# EAGLE board CFO rev 1.4_dviid_jsr (EAGLE 5.07)
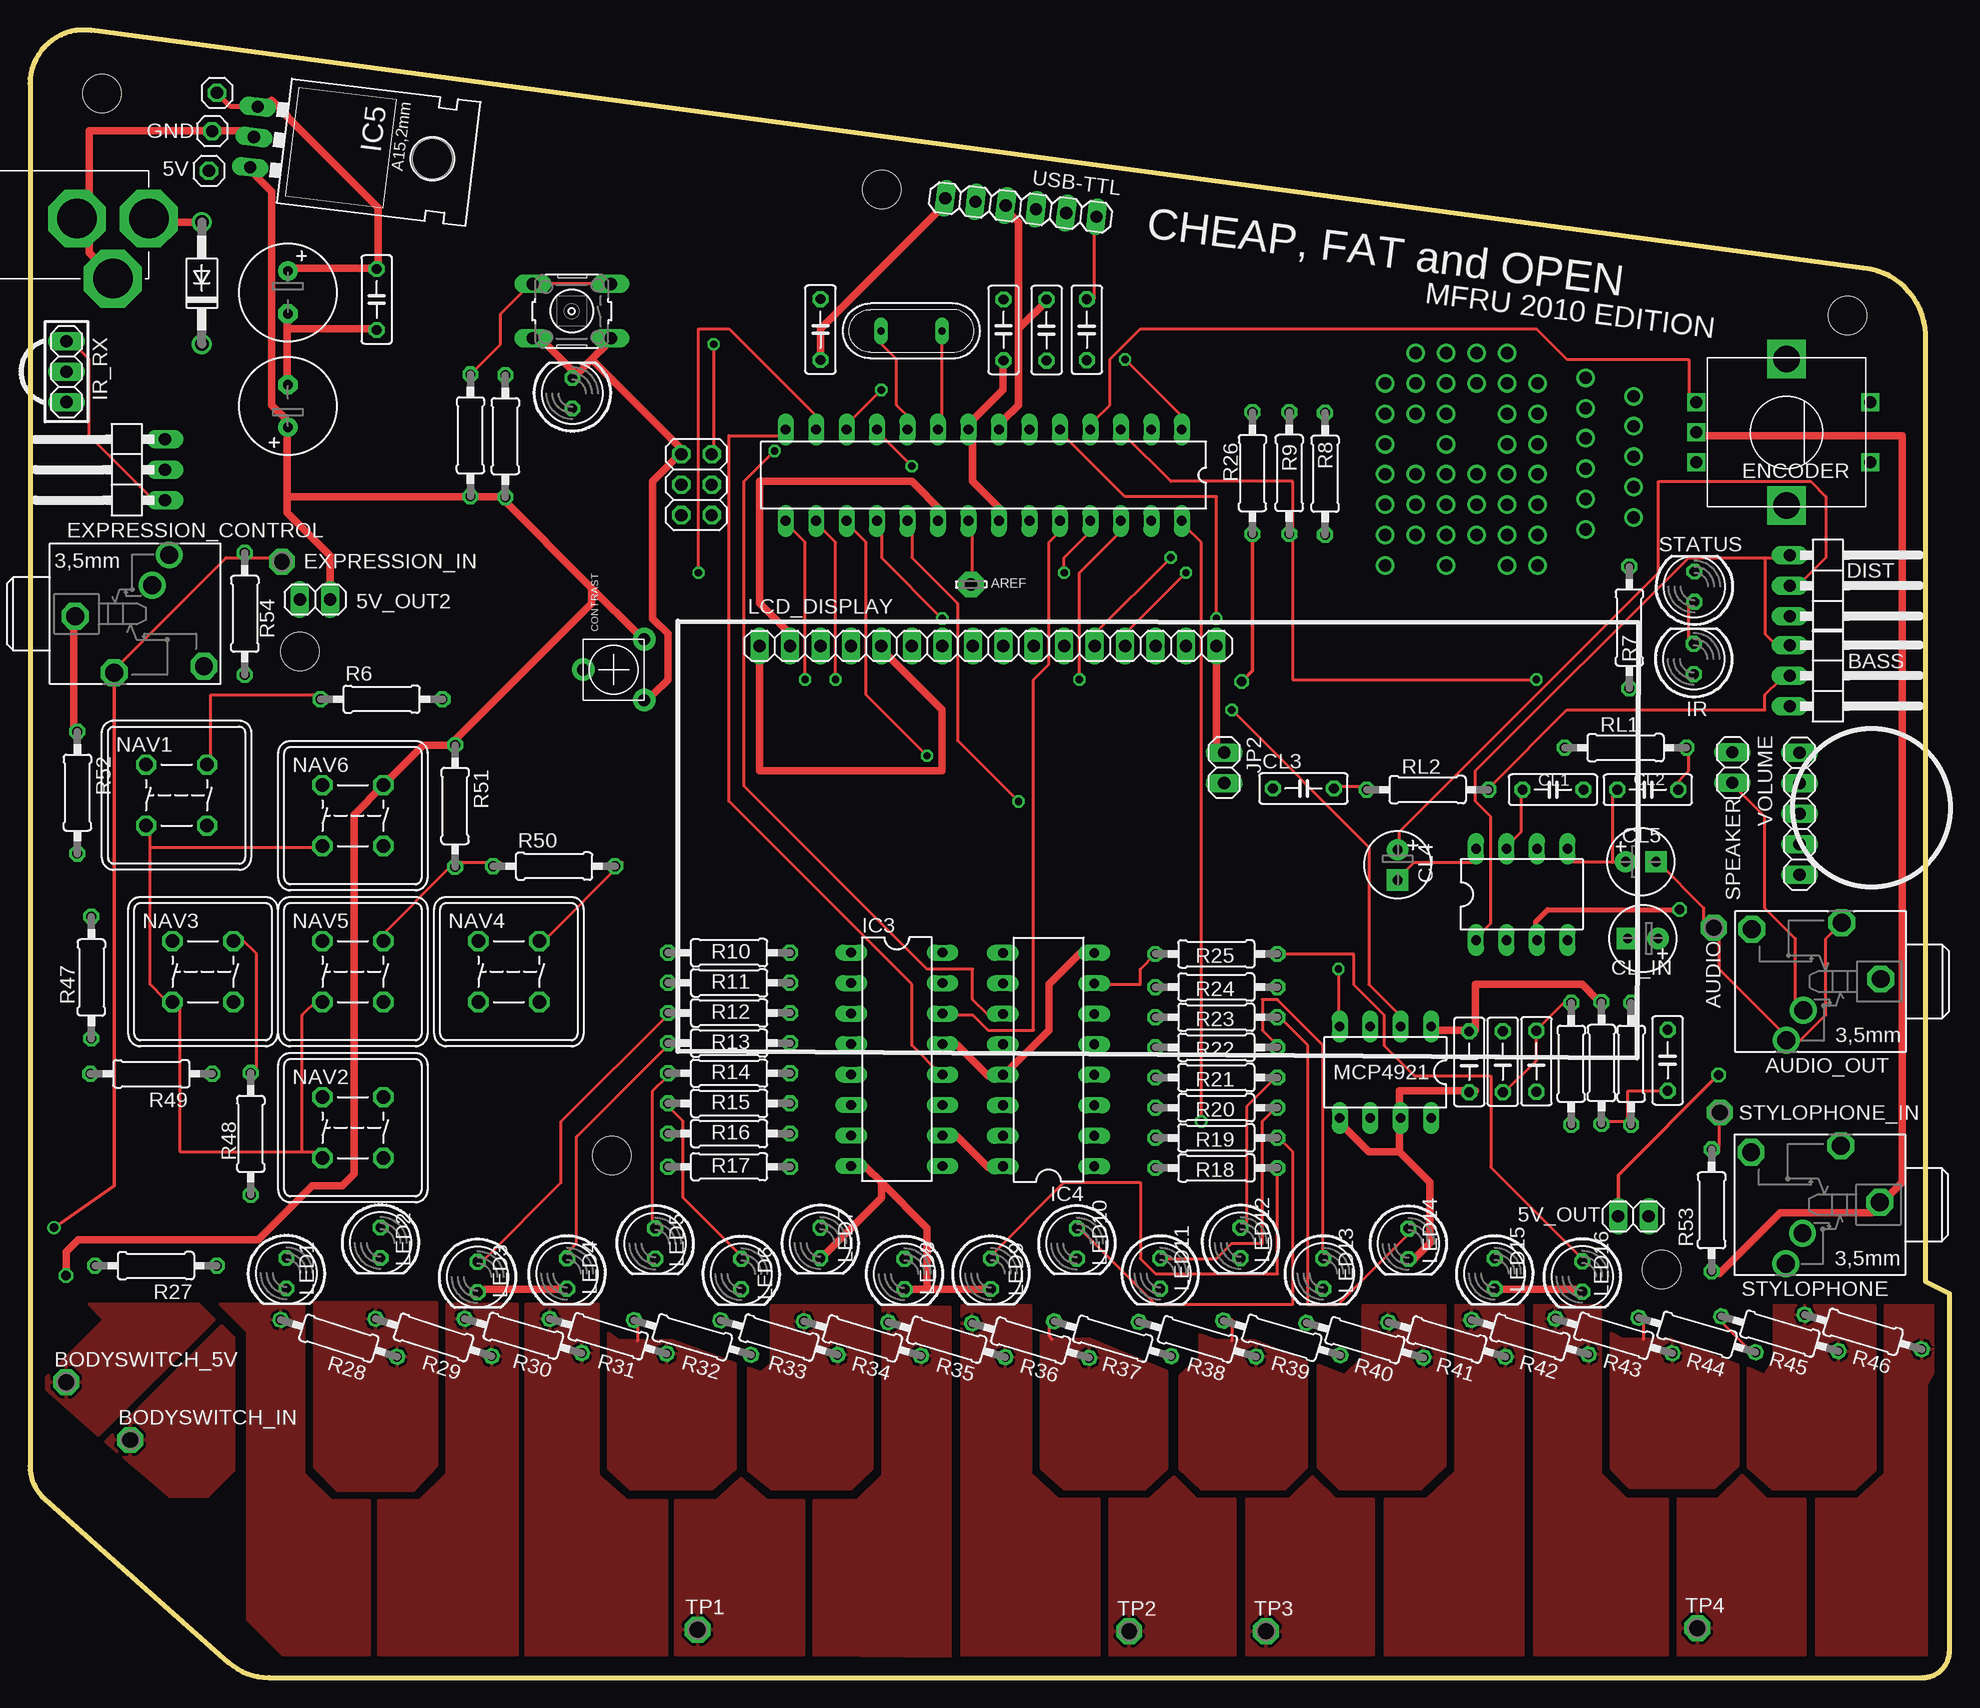
[diagram p0: board, top side]
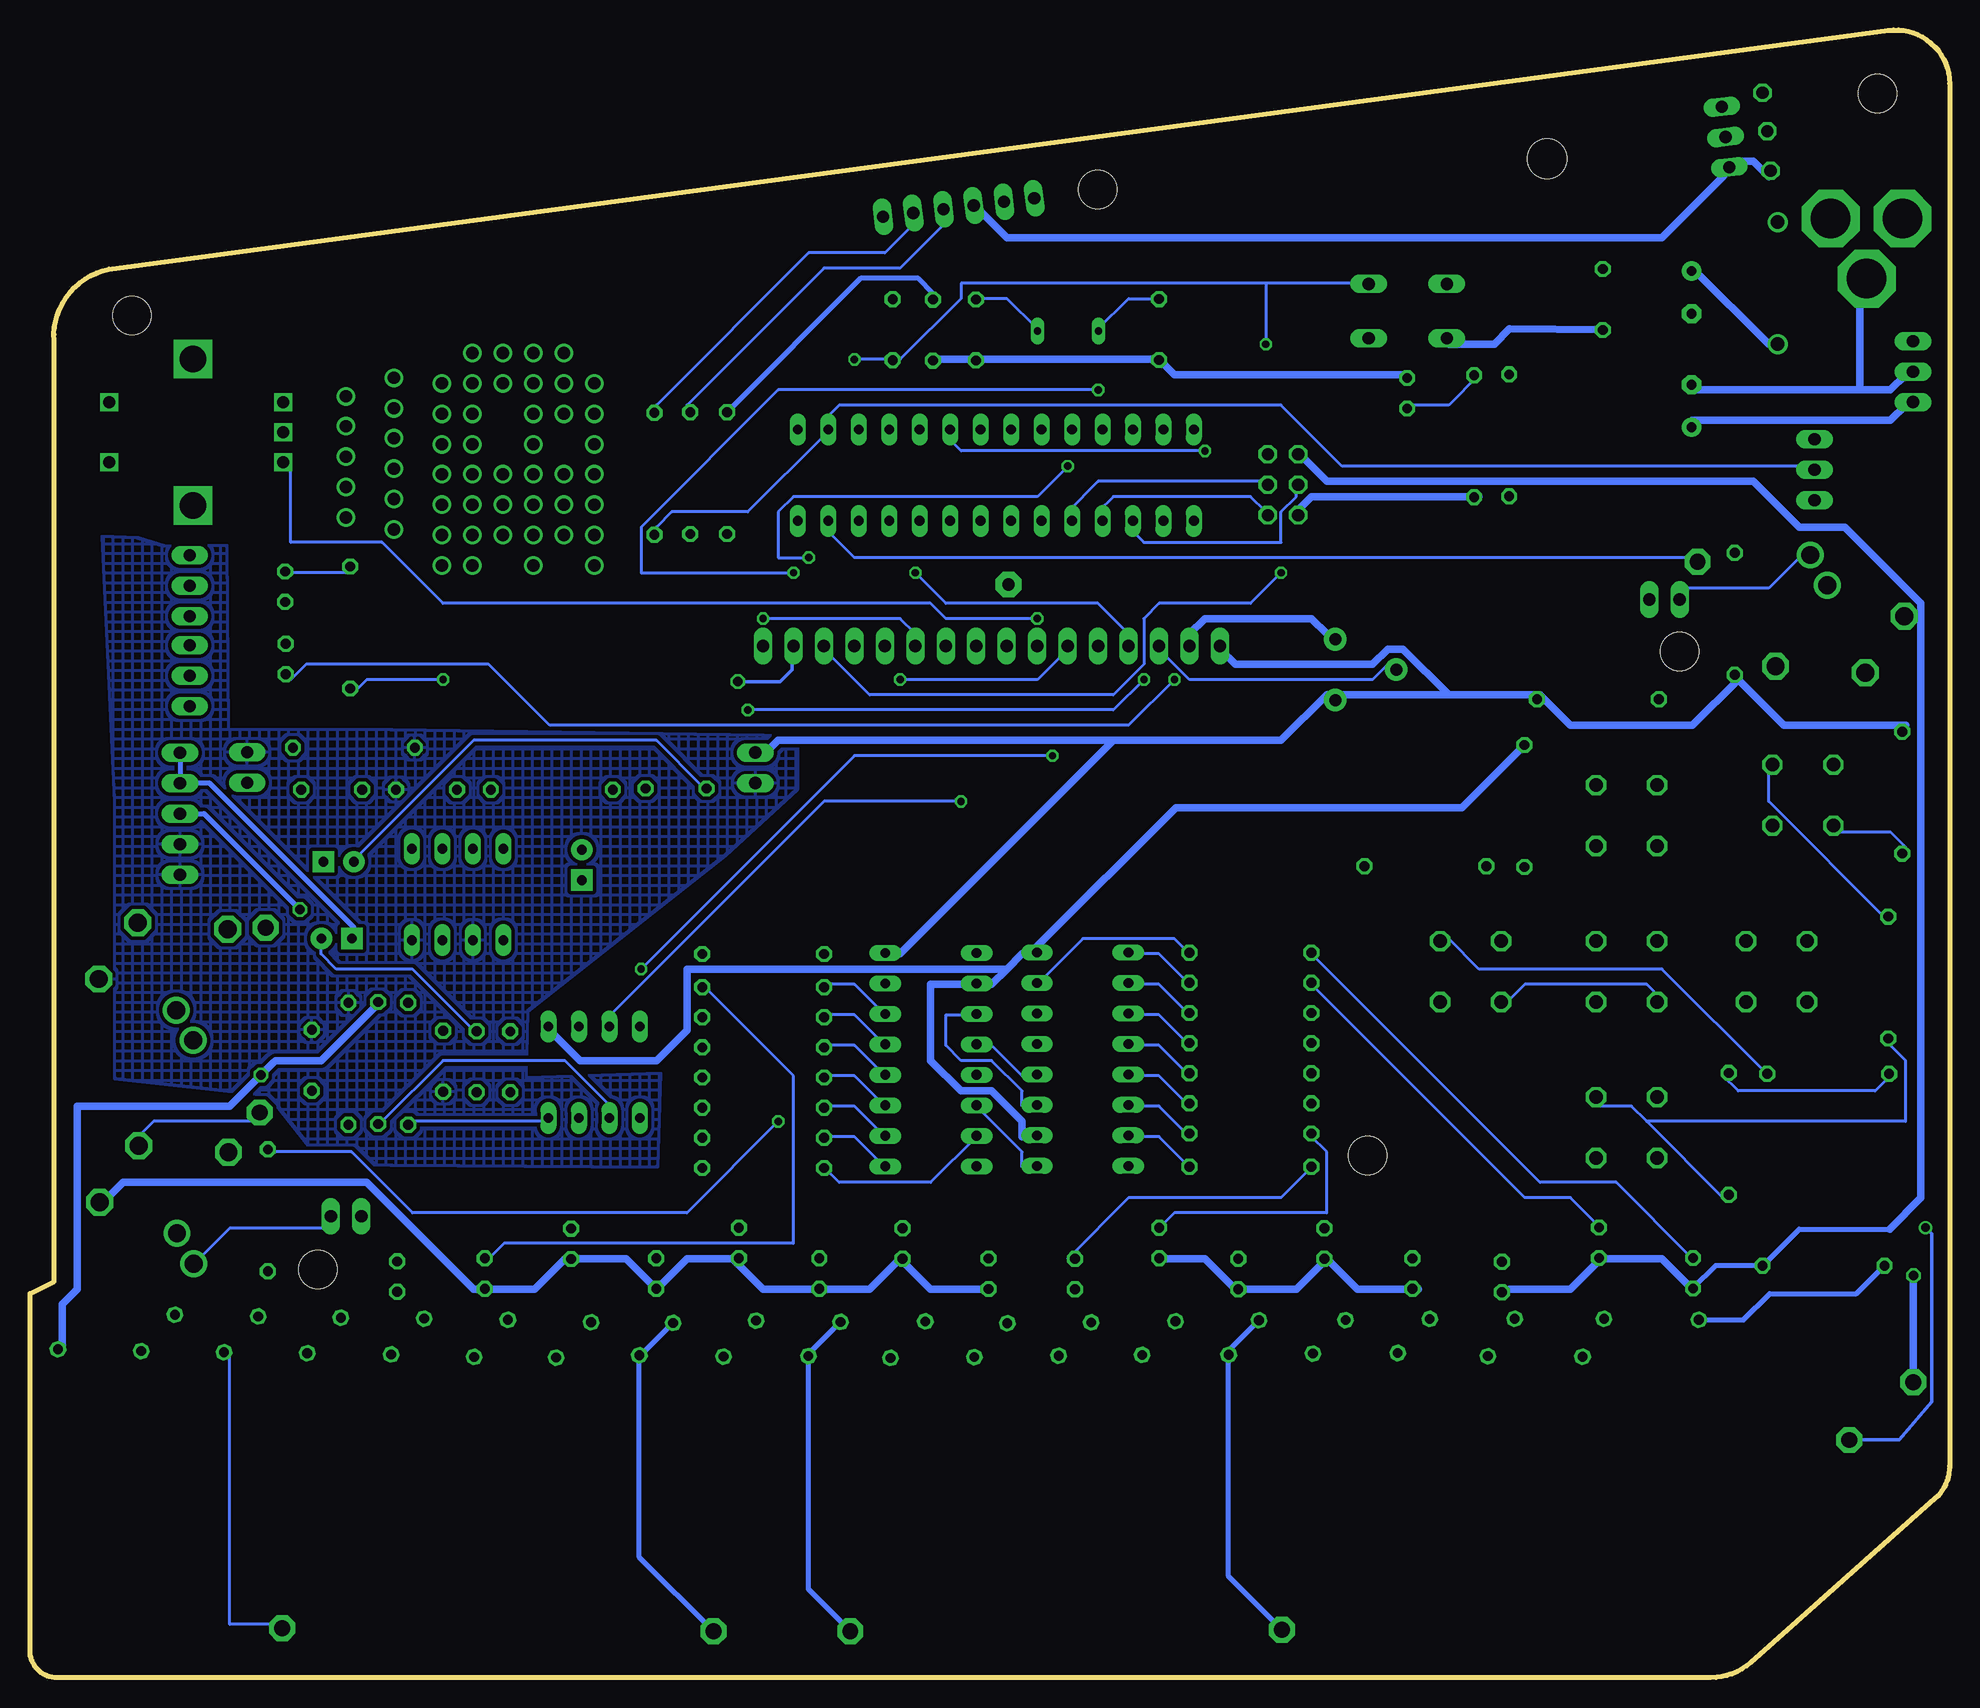
[diagram p1: board, bottom side, seen from below]

Size 160 x 137.31 mm. Coordinates in mm from the lower left corner, seen from the top.
Outline: 158,111.4 arc82 153.43,117.37 5.11,137.27 arc98 0,132.84 0,17.62 arc48 1.21,14.92 16.58,1.26 arc42 19.9,0 157.76,0 arc90 160,2.24 160,32 158,33 158,111.4
Copper layers (1*16): Top 0.035mm / dielectric 1.5mm / Bottom 0.035mm
Design rules "default": minimum track width 10mil, minimum drill 24mil, track to track 8mil, track to pad 8mil, pad to pad 8mil, via to via 8mil, smd to smd 8mil, copper to edge 40mil, drill to drill 8mil, minimum pad ring 10mil, minimum via ring 8mil, stop-mask expansion 4mil, vias tented up to drill 0mil, thermal gap 10mil
Net classes: 1 power: width 0.61 mm
Holes 3.2 mm at 48.5,43.5 136,34 151.5,113.5 71,124 6,132 22.5,85.5

## Footprints (pad centres in the part's own frame; a part is rotated, then mirrored left to right if it is on the bottom)
1X01 = drill 1.016 octagon: 1 0,0
1X02 = drill 1.016 long: 1 -1.27,0; 2 1.27,0
LSP10 = drill 1.016 pad 2.159 octagon: MP 0,0
P1-13 = drill 1.321 pad 2.159 octagon: 1 0,0
PG203J = drill 1.499 octagon: 1 -5.004,-0.203; 4 5.74,-4.369; 5 -1.753,-4.902 | drill 1.499 round: 2 2.845,4.902; 3 1.448,2.388
1X03/90 = drill 1.016 long: 1 -2.54,-3.81; 2 0,-3.81; 3 2.54,-3.81
C050-025X075 = drill 0.813 octagon: 1 -2.54,0; 2 2.54,0
E3,5-8 = drill 0.813 pad 1.6 round: + -1.778,0 | drill 0.813 pad 1.6 octagon: - 1.778,0
E2,5-6 = drill 0.813 pad 1.778 round: + 0,0 | drill 0.813 pad 1.778 square: - 2.54,0
TRIM_POT_PTH = drill 1 pad 1.88 round: 1 -2.54,-2.54; 2 0,2.54; 3 2.54,-2.54
DO41-10 = drill 1.118 round: A 5.08,0; C -5.08,0
DC-21MM = drill 3.302 pad 4.826 octagon: 1 -5.08,-3.353; 2 -0.076,-6.35; 3 -0.076,-0.356
ALPS_EC12E_SW = drill 1 square: A -2.5,-7.5; B 2.5,-7.5; C 0,-7.5; D -2.5,7; E 2.5,7 | drill 2.2 square: GND1 -6.1,0; GND2 6.1,0
DIL28-3 = drill 0.813 long: 1 -16.51,-3.81; 2 -13.97,-3.81; 3 -11.43,-3.81; 4 -8.89,-3.81; 5 -6.35,-3.81; 6 -3.81,-3.81; 7 -1.27,-3.81; 8 1.27,-3.81; 9 3.81,-3.81; 10 6.35,-3.81; 11 8.89,-3.81; 12 11.43,-3.81; 13 13.97,-3.81; 14 16.51,-3.81; 15 16.51,3.81; 16 13.97,3.81; 17 11.43,3.81; 18 8.89,3.81; 19 6.35,3.81; 20 3.81,3.81; 21 1.27,3.81; 22 -1.27,3.81; 23 -3.81,3.81; 24 -6.35,3.81; 25 -8.89,3.81; 26 -11.43,3.81; 27 -13.97,3.81; 28 -16.51,3.81
DIL16 = drill 0.813 long: 1 -8.89,-3.81; 2 -6.35,-3.81; 3 -3.81,-3.81; 4 -1.27,-3.81; 5 1.27,-3.81; 6 3.81,-3.81; 7 6.35,-3.81; 8 8.89,-3.81; 9 8.89,3.81; 10 6.35,3.81; 11 3.81,3.81; 12 1.27,3.81; 13 -1.27,3.81; 14 -3.81,3.81; 15 -6.35,3.81; 16 -8.89,3.81
78XXL = drill 1.016 long: GND 0,-3.81; IN -2.54,-3.81; OUT 2.54,-3.81 | hole 3.302: 0,11.176
2X03 = drill 1.016 octagon: 1 -2.54,-1.27; 2 -2.54,1.27; 3 0,-1.27; 4 0,1.27; 5 2.54,-1.27; 6 2.54,1.27
LED5MM = drill 0.813 octagon: A -1.27,0; K 1.27,0
1X03 = drill 1.016 long: 1 -2.54,0; 2 0,0; 3 2.54,0
1X16 = drill 1.016 long: 1 -19.05,0; 2 -16.51,0; 3 -13.97,0; 4 -11.43,0; 5 -8.89,0; 6 -6.35,0; 7 -3.81,0; 8 -1.27,0; 9 1.27,0; 10 3.81,0; 11 6.35,0; 12 8.89,0; 13 11.43,0; 14 13.97,0; 15 16.51,0; 16 19.05,0
DIL08 = drill 0.813 long: 1 -3.81,-3.81; 2 -1.27,-3.81; 3 1.27,-3.81; 4 3.81,-3.81; 5 3.81,3.81; 6 1.27,3.81; 7 -1.27,3.81; 8 -3.81,3.81
DTE6K = drill 1.118 octagon: 1 -2.54,2.54; 2 2.54,2.54; 3 2.54,-2.54; 4 -2.54,-2.54
0207/10 = drill 0.813 octagon: 1 -5.08,0; 2 5.08,0
B3F-10XX = drill 1.016 long: 1 -3.251,2.261; 2 3.251,2.261; 3 -3.251,-2.261; 4 3.251,-2.261
LM386 = drill 0.813 long: 1 2.54,-2.54; 2 5.08,-2.54; 3 7.62,-2.54; 4 10.16,-2.54; 5 10.16,5.08; 6 7.62,5.08; 7 5.08,5.08; 8 2.54,5.08
1X06 = drill 1.016 long: 1 -6.35,0; 2 -3.81,0; 3 -1.27,0; 4 1.27,0; 5 3.81,0; 6 6.35,0
1X05 = drill 1.016 long: 1 -5.08,0; 2 -2.54,0; 3 0,0; 4 2.54,0; 5 5.08,0
QS = drill 0.61 long: 1 -2.54,0; 2 2.54,0

## Placement (x,y rotation side)
5V  [1X01]  14.91,125.57 0 top
5V_OUT  [1X02]  133.65,38.45 180 top
5V_OUT2  [1X02]  23.76,89.84 0 top
AREF  LSP10  [LSP10]  78.44,91.1 0 top
AUDIO  TPPAD1-13  [P1-13]  140.35,62.5 0 top
AUDIO_OUT  PG203J  [PG203J]  149.25,58.02 180 top
BASS  switch  [1X03/90]  150.5,83.5 270 top
BODYSWITCH_5V  TPPAD1-13  [P1-13]  3.01,24.63 0 top
BODYSWITCH_IN  TPPAD1-13  [P1-13]  8.35,19.81 0 top
C1  100n  [C050-025X075]  84.74,112.3 270 top
C2  22p  [C050-025X075]  81.15,112.31 90 top
C3  22p  [C050-025X075]  65.89,112.34 90 top
C4  100n  [C050-025X075]  88.09,112.33 270 top
C5  100n  [C050-025X075]  28.9,114.85 90 top
C6  100u  [E3,5-8]  21.49,115.44 270 top
C7  100u  [E3,5-8]  21.5,105.97 90 top
C8  100nF  [C050-025X075]  119.97,51.32 270 top
C9  100nF  [C050-025X075]  136.51,51.44 90 top
C10  10nF  [C050-025X075]  125.56,51.37 270 top
C11  10nF  [C050-025X075]  122.76,51.33 90 top
CL1  100n  [C050-025X075]  126.95,74 0 top
CL2  47n  [C050-025X075]  134.85,74 0 top
CL3  33n  [C050-025X075]  106.15,74.1 0 top
CL4  10u  [E2,5-6]  114,69 270 top
CL5  330u  [E2,5-6]  133,68 0 top
CL_IN  2u2  [E2,5-6]  135.7,61.6 180 top
CONTRAST  4.7k  [TRIM_POT_PTH]  48.65,84 90 top
D1  1N4004  [DO41-10]  14.32,116.21 90 top
DC1  DC21MMX  [DC-21MM]  3.56,121.67 90 top
DIST  switch  [1X03/90]  150.5,91 270 top
ENCODER  EC12E_SW  [ALPS_EC12E_SW]  146.41,103.78 270 top
EXPRESSION_CONTROL  PG203J  [PG203J]  8.76,88.65 0 top
EXPRESSION_IN  TPPAD1-13  [P1-13]  21,93 0 top
GND  [1X01]  15.19,128.87 0 top
IC1  ATMEGA  [DIL28-3]  79.49,100.21 180 top
IC3  74HC595N  [DIL16]  72.25,51.53 270 top
IC4  74HC595N  [DIL16]  84.9,51.5 90 top
IC5  [78XXL]  22.45,127.93 263 top
ICSP  ICSP  [2X03]  55.55,99.42 90 top
IR  [LED5MM]  138.68,84.89 90 top
IR_RX  [1X03]  3.05,108.84 90 top
JP2  [1X02]  99.54,75.83 270 top
LCD_DISPLAY  [1X16]  79.86,85.98 0 top
LED1  [LED5MM]  21.38,33.71 270 top
LED2  [LED5MM]  29.22,36.24 270 top
LED3  [LED5MM]  37.3,33.39 270 top
LED4  [LED5MM]  44.76,33.67 270 top
LED5  [LED5MM]  52.11,36.18 270 top
LED6  [LED5MM]  59.28,33.63 270 top
LED7  [LED5MM]  65.88,36.23 270 top
LED8  [LED5MM]  72.89,33.63 270 top
LED9  [LED5MM]  80.1,33.66 270 top
LED10  [LED5MM]  87.26,36.18 270 top
LED11  [LED5MM]  94.21,33.67 270 top
LED12  [LED5MM]  100.91,36.23 270 top
LED13  [LED5MM]  107.8,33.67 270 top
LED14  [LED5MM]  114.9,36.15 270 top
LED15  [LED5MM]  122.09,33.67 270 top
LED16  [LED5MM]  129.39,33.42 270 top
MCP4921  [DIL08]  112.98,50.45 180 top
NAV1  DTE6K  [DTE6K]  12.22,73.54 0 top
NAV2  DTE6K  [DTE6K]  26.92,45.84 0 top
NAV3  DTE6K  [DTE6K]  14.42,58.84 0 top
NAV4  DTE6K  [DTE6K]  39.92,58.84 0 top
NAV5  DTE6K  [DTE6K]  26.92,58.84 0 top
NAV6  DTE6K  [DTE6K]  26.92,71.84 0 top
PWR_LED  [LED5MM]  45.21,107.03 90 top
R1  10k  [0207/10]  130.99,51.22 90 top
R2  1K  [0207/10]  39.62,103.45 270 top
R3  10k  [0207/10]  133.46,51.15 270 top
R4  4.7k  [0207/10]  128.47,51.16 270 top
R5  10k  [0207/10]  36.71,103.53 270 top
R6  220  [0207/10]  29.3,81.54 0 top
R7  47  [0207/10]  133.31,87.52 270 top
R8  1k  [0207/10]  107.95,100.32 90 top
R9  1k  [0207/10]  104.97,100.38 90 top
R10  220  [0207/10]  58.27,60.42 0 top
R11  220  [0207/10]  58.27,57.9 0 top
R12  220  [0207/10]  58.27,55.39 0 top
R13  220  [0207/10]  58.27,52.88 0 top
R14  220  [0207/10]  58.27,50.37 0 top
R15  220  [0207/10]  58.27,47.86 0 top
R16  220  [0207/10]  58.27,45.34 0 top
R17  220  [0207/10]  58.27,42.58 0 top
R18  220  [0207/10]  98.89,42.47 180 top
R19  220  [0207/10]  98.89,44.99 180 top
R20  220  [0207/10]  98.89,47.5 180 top
R21  220  [0207/10]  98.89,50.01 180 top
R22  220  [0207/10]  98.89,52.52 180 top
R23  220  [0207/10]  98.89,55.03 180 top
R24  220  [0207/10]  98.89,57.55 180 top
R25  220  [0207/10]  98.89,60.31 180 top
R26  4.7  [0207/10]  101.9,100.38 270 top
R27  330  [0207/10]  10.5,34.33 180 top
R28  330  [0207/10]  25.74,28.28 162.4 top
R29  330  [0207/10]  33.64,28.35 162.2 top
R30  330  [0207/10]  41.12,28.48 163.7 top
R31  330  [0207/10]  48.2,28.45 163.5 top
R32  330  [0207/10]  55.21,28.36 163.5 top
R33  330  [0207/10]  62.43,28.34 163.5 top
R34  330  [0207/10]  69.39,28.27 163.5 top
R35  330  [0207/10]  76.42,28.16 163.5 top
R36  330  [0207/10]  83.41,28.09 163.5 top
R37  330  [0207/10]  90.25,28.24 163.5 top
R38  330  [0207/10]  97.32,28.2 163.5 top
R39  330  [0207/10]  104.34,28.31 163.5 top
R40  330  [0207/10]  111.27,28.12 163.5 top
R41  330  [0207/10]  118.1,28.17 163.5 top
R42  330  [0207/10]  125.03,28.38 163.5 top
R43  330  [0207/10]  132.02,28.48 163.5 top
R44  330  [0207/10]  138.96,28.56 163.5 top
R45  330  [0207/10]  145.86,28.66 163.5 top
R46  330  [0207/10]  152.8,28.81 163.5 top
R47  220  [0207/10]  5.11,58.34 90 top
R48  220  [0207/10]  18.4,45.32 270 top
R49  220  [0207/10]  10.11,50.32 180 top
R50  220  [0207/10]  43.69,67.62 0 top
R51  220  [0207/10]  35.43,72.64 270 top
R52  10k  [0207/10]  3.95,73.75 270 top
R53  10k  [0207/10]  140.17,38.94 90 top
R54  10k  [0207/10]  17.9,88.65 90 top
RL1  10  [0207/10]  133,77.5 180 top
RL2  10k  [0207/10]  116.5,74 180 top
RX_ON/OFF  [1X03/90]  7.44,100.66 90 top
S1  [B3F-10XX]  45.16,113.88 180 top
SPEAKER  [1X02]  141.9,75.85 90 top
STATUS  [LED5MM]  138.74,90.92 90 top
STYLOPHONE  PG203J  [PG203J]  149.2,39.41 180 top
STYLOPHONE_IN  TPPAD1-13  [P1-13]  140.85,47.1 0 top
TP1  TPPAD1-13  [P1-13]  55.64,4 0 top
TP2  TPPAD1-13  [P1-13]  91.62,3.88 0 top
TP3  TPPAD1-13  [P1-13]  103.03,3.88 0 top
TP4  TPPAD1-13  [P1-13]  138.98,4.13 0 top
U$1  LM386  [LM386]  118,64 0 top
USB-TTL  [1X06]  82.59,122.52 173 top
VIN  VIN  [1X01]  15.59,132.07 0 top
VOLUME  [1X05]  147.5,72 90 top
XTAL  16mhz  [QS]  73.48,112.23 180 top

## Library data of the parts
5V 5V_OUT 5V_OUT2 BASS DIST GND ICSP IR_RX JP2 LCD_DISPLAY RX_ON/OFF SPEAKER USB-TTL VIN VOLUME = pinhead
AREF = solpad
AUDIO BODYSWITCH_5V BODYSWITCH_IN EXPRESSION_IN STYLOPHONE_IN TP1-TP4 = testpad
AUDIO_OUT EXPRESSION_CONTROL STYLOPHONE = con-hirschmann
C1-C11 CL1-CL3 R1-R54 RL1 RL2 = rcl
CL4 CL5 CL_IN U$1 = blushingboy_experimental
CONTRAST = SparkFun
D1 = diode
DC1 = powersupply
ENCODER = switch-alps
IC1 = atmel
IC3 IC4 = 74xx-eu
IC5 = v-reg
IR LED1-LED16 PWR_LED STATUS = led
MCP4921 = ic-package
NAV1-NAV6 = switch-misc
S1 = switch-omron
XTAL = special

## Nets
A0: IC1.23
A1: IC1.24 IC3.14
A2: IC1.25 LCD_DISPLAY.4
A3: IC1.26 LCD_DISPLAY.6
A4: BODYSWITCH_IN.1 EXPRESSION_CONTROL.5 EXPRESSION_IN.1 IC1.27 R54.2
A5: IC1.28 R53.2 STYLOPHONE.5 STYLOPHONE_IN.1
AGND: AUDIO_OUT.1 C9.2 C10.2 CL1.2 JP2.2 R3.1 RL1.2 SPEAKER.2 U$1.2 U$1.4 VOLUME.1 VOLUME.2
AREF: AREF.MP IC1.21
BROWN: USB-TTL.5
D2: ENCODER.A IC1.4
D3: IC1.5 LCD_DISPLAY.11
D4: IC1.6 IC3.11 IC4.11
D5: IC1.11 LCD_DISPLAY.12
D6: IC1.12 LCD_DISPLAY.13
D7: IC1.13 LCD_DISPLAY.14
D8: IC1.14 IC3.12 IC4.12
D9: IC1.15 IR.A
D10: IC1.16 MCP4921.2
D11: IC1.17 ICSP.4 MCP4921.4
D12: ENCODER.B IC1.18 ICSP.1
D13: IC1.19 ICSP.3 MCP4921.3
GND [power]: C1.2 C2.1 C3.1 C5.1 C6.- C7.- C8.2 CONTRAST.1 DC1.1 DC1.3 ENCODER.C EXPRESSION_CONTROL.1 GND.1 IC1.8 IC1.22 IC3.8 IC3.13 IC4.8 IC4.13 IC5.GND ICSP.6 IR_RX.2 JP2.1 LCD_DISPLAY.1 LCD_DISPLAY.5 LCD_DISPLAY.16 LED1.K LED2.K LED3.K LED4.K LED5.K LED6.K LED7.K LED8.K LED9.K LED10.K LED11.K LED12.K LED13.K LED14.K LED15.K LED16.K MCP4921.5 MCP4921.7 PWR_LED.K R6.2 R27.1 R52.1 R53.1 R54.1 S1.1 S1.2 STYLOPHONE.1 USB-TTL.6
GREEN: C4.1 USB-TTL.1
LEFT: CL_IN.- VOLUME.4 VOLUME.5
N$1: C10.1 C11.1 R4.1
N$2: C11.2 CL_IN.+
N$3: PWR_LED.A R2.1
N$4: R27.2 R28.2
N$5: 5V_OUT.1 STYLOPHONE.2
N$6: C2.2 IC1.9 XTAL.1
N$7: C3.2 IC1.10 XTAL.2
N$8 [power]: D1.A DC1.2
N$9: IR.K STATUS.A
N$10: CL4.- U$1.8
N$11: CL1.1 U$1.7
N$12: IC3.9 IC4.14
N$13: R7.1 STATUS.K
N$14: NAV1.2 R6.1 R47.2
N$15: NAV2.2 R47.1 R48.2
N$16: 5V_OUT2.1 EXPRESSION_CONTROL.2
N$17: LED1.A R10.1
N$18: LED2.A R11.1
N$19: NAV3.2 R48.1 R49.2
N$20: LED3.A R12.1
N$21: LED4.A R13.1
N$22: LED5.A R14.1
N$23: LED6.A R15.1
N$24: LED7.A R16.1
N$25: LED8.A R17.1
N$26: LED9.A R18.1
N$27: LED10.A R19.1
N$28: LED11.A R20.1
N$29: LED12.A R21.1
N$30: LED13.A R22.1
N$31: LED14.A R23.1
N$32: LED15.A R24.1
N$33: LED16.A R25.1
N$34: IC3.15 R10.2
N$35: IC3.1 R11.2
N$36: IC3.2 R12.2
N$37: IC3.3 R13.2
N$38: IC3.4 R14.2
N$39: IC3.5 R15.2
N$40: IC3.6 R16.2
N$41: IC3.7 R17.2
N$42: IC4.15 R18.2
N$43: IC4.1 R19.2
N$44: IC4.2 R20.2
N$45: IC4.3 R21.2
N$46: IC4.4 R22.2
N$47: IC4.5 R23.2
N$48: IC4.6 R24.2
N$49: IC4.7 R25.2
N$50: R28.1 R29.2
N$51: R29.1 R30.2
N$52: CONTRAST.2 LCD_DISPLAY.3
N$53: R30.1 R31.2
N$54: LCD_DISPLAY.15 R26.2
N$55: R31.1 R32.2
N$56: R32.1 R33.2 TP1.1
N$57: R33.1 R34.2
N$58: R34.1 R35.2
N$59: R35.1 R36.2
N$60: R36.1 R37.2
N$61: R37.1 R38.2 TP2.1
N$62: R38.1 R39.2
N$63: R39.1 R40.2 TP3.1
N$64: R40.1 R41.2
N$65: R41.1 R42.2
N$66: R42.1 R43.2
N$67: R43.1 R44.2
N$68: R44.1 R45.2 TP4.1
N$69: R45.1 R46.2
N$70: NAV4.2 R49.1 R50.2
N$71: NAV5.2 R50.1 R51.2
N$72: NAV1.4 NAV2.4 NAV3.4 NAV4.4 NAV5.4 NAV6.4 R52.2
N$73: IR_RX.3 RX_ON/OFF.1
N$74: CL2.1 CL3.1 CL5.+ U$1.5
N$75: R9.2 USB-TTL.3
N$76: R8.2 USB-TTL.2
N$77: CL3.2 RL2.2
N$78: CL2.2 RL1.1
N$79: BASS.1 DIST.1 U$1.1
N$80: CL4.+ DIST.2
N$81: BASS.2 RL2.1
N$82: U$1.3 VOLUME.3
N$83: AUDIO_OUT.3 SPEAKER.1
N$84: AUDIO.1 AUDIO_OUT.2 AUDIO_OUT.5 CL5.-
RESET: C4.2 IC1.1 ICSP.5 R5.1 S1.3 S1.4
RX: IC1.2 R8.1 RX_ON/OFF.2
TX: IC1.3 R7.2 R9.1
VCC [power]: 5V.1 5V_OUT2.2 5V_OUT.2 BODYSWITCH_5V.1 C1.1 C7.+ C8.1 CONTRAST.3 IC1.7 IC1.20 IC3.10 IC3.16 IC4.10 IC4.16 IC5.OUT ICSP.2 IR_RX.1 LCD_DISPLAY.2 MCP4921.1 NAV6.2 R1.2 R2.2 R5.2 R26.1 R46.1 R51.1 USB-TTL.4
VIN [power]: C5.2 C6.+ D1.C IC5.IN VIN.1
VOUT: MCP4921.8 R4.2
VREF: C9.1 MCP4921.6 R1.1 R3.2

## Tracks (layer width: path | path; a pad name or v marks a point on that pad's centre or on a via)
A1
  Top 0.254: IC3.14 77.31,55.24 78.58,55.24 79.85,53.97 83.66,53.97 83.66,83.18 84.93,84.45 84.93,94.61 86.2,95.88 IC1.24
A2  (via drill 0.61)
  Top 0.254: v86.2,92.07 86.2,93.34 88.74,95.88 IC1.25
  Bottom 0.254: v86.2,92.07 83.66,89.53 70.96,89.53 68.42,86.99 LCD_DISPLAY.4
A3  (via drill 0.61)
  Top 0.254: v87.47,83.18 87.47,92.07 91.28,95.88 IC1.26
  Bottom 0.254: v87.47,83.18 76.04,83.18 73.5,85.72 LCD_DISPLAY.6
A4  (via drill 0.7)
  Top 0.254: 17.62,93.34 20.16,93.34 EXPRESSION_IN.1 | 17.62,93.34 16.35,93.34 7.46,84.45 EXPRESSION_CONTROL.5 | 17.62,93.34 R54.2
  Top 0.305: EXPRESSION_CONTROL.5 7.01,41.01 v2,37.5
  Bottom 0.254: IC1.27 93.82,95.88 91.28,93.34 21.43,93.34 EXPRESSION_IN.1
  Bottom 0.305: BODYSWITCH_IN.1 4.19,19.81 1.5,23 1.5,37 v2,37.5
  pour Top: 15.97,29.33 16.98,28.32 16.98,17.27 14.83,15.11 11.65,15.11 6.32,19.68
A5  (via drill 0.61)
  Top 0.254: v97.63,46.35 97.63,94.61 96.36,95.88 IC1.28 | STYLOPHONE_IN.1 140.81,46.35 140.81,43.81 R53.2
  Bottom 0.254: v97.63,46.35 105.25,38.73 128.11,38.73 133.19,43.81 139.54,43.81 R53.2 | STYLOPHONE.5 150.97,45.08 149.7,46.35 140.81,46.35 STYLOPHONE_IN.1
AGND
  pour Bottom (isolate 0.305, hatched): 143.46,78.99 143.55,94.35 148.7,94.3 151,95 154.03,95.12 153,73 153,67 152.99,49.91 140.12,48.51 135.55,42.75 107.65,42.54 107.41,50.38 118.59,50 118.5,55.5 102,68.5 96,74 96,78.5 132.6,79.04
AREF
  Top 0.254: IC1.21 78.58,95.88 78.58,92.07 AREF.MP
D2
  Top 0.254: IC1.4 88.74,104.77 90.01,106.04 90.01,109.85 92.55,112.39 125.57,112.39 128.11,109.85 138.27,109.85 138.27,106.04 ENCODER.A
D3  (via drill 0.61)
  Top 0.254: v98.9,88.26 98.9,98.42 91.28,98.42 86.2,103.5 IC1.5
  Bottom 0.254: v98.9,88.26 87.47,88.26 86.2,86.99 LCD_DISPLAY.11
D4  (via drill 0.61)
  Top 0.254: v62.07,102.23 59.53,99.69 59.53,74.29 74.77,59.05 78.58,59.05 78.58,56.51 79.85,55.24 IC4.11
  Bottom 0.254: IC3.11 77.31,47.62 77.31,48.89 79.85,51.43 82.39,51.43 83.66,52.7 83.66,55.24 81.12,55.24 IC4.11 | v62.07,102.23 82.39,102.23 83.66,103.5 IC1.6
D5  (via drill 0.61)
  Top 0.254: v73.5,100.96 70.96,103.5 IC1.11 | v95.09,93.34 88.74,86.99 LCD_DISPLAY.12
  Bottom 0.254: v73.5,100.96 76.04,98.42 96.36,98.42 97.63,97.15 97.63,93.34 v95.09,93.34
D6  (via drill 0.61)
  Top 0.254: v70.96,107.31 68.42,104.77 IC1.12 | v96.36,92.07 91.28,86.99 LCD_DISPLAY.13
  Bottom 0.254: v70.96,107.31 97.63,107.31 109.06,95.88 109.06,92.07 v96.36,92.07
D7  (via drill 0.61)
  Top 0.254: v55.72,92.07 55.72,112.39 58.26,112.39 65.88,104.77 IC1.13
  Bottom 0.254: v55.72,92.07 58.26,89.53 65.88,89.53 67.15,88.26 67.15,84.45 69.69,81.91 90.01,81.91 93.82,85.72 LCD_DISPLAY.14
D8
  Top 0.254: IC1.14 63.34,103.5 58.26,103.5 58.26,73.02 73.5,57.78 73.5,52.7 76.04,50.16 IC3.12
  Bottom 0.254: IC3.12 77.31,50.16 79.85,52.7 IC4.12
D9  (via drill 0.61)
  Top 0.254: v64.61,83.18 64.61,94.61 63.34,95.88 IC1.15
  Bottom 0.254: v64.61,83.18 68.42,79.37 116.68,79.37 121.76,84.45 137,84.45 138.27,83.18 IR.A
D10  (via drill 0.61)
  Top 0.254: v67.15,83.18 67.15,94.61 65.88,95.88 IC1.16 | v100.17,80.64 111.6,69.21 111.6,57.78 114.14,55.24 MCP4921.2
  Bottom 0.254: v67.15,83.18 69.69,80.64 v100.17,80.64
D11  (via drill 0.61)
  Top 0.254: v109.06,59.05 109.06,55.24 MCP4921.4 | v74.77,76.83 69.69,81.91 69.69,94.61 68.42,95.88 IC1.17
  Bottom 0.254: v109.06,59.05 91.28,76.83 v74.77,76.83 | ICSP.4 54.45,99.69 54.45,98.42 55.72,97.15 55.72,94.61 67.15,94.61 68.42,95.88 IC1.17
D12  (via drill 0.61)
  Top 0.254: v76.04,88.26 70.96,93.34 70.96,95.88 IC1.18
  Bottom 0.254: IC1.18 70.96,97.15 69.69,98.42 58.26,98.42 56.99,97.15 ICSP.1 | v76.04,88.26 83.66,88.26 84.93,89.53 125.57,89.53 130.65,94.61 138.27,94.61 138.27,100.96 ENCODER.B
D13  (via drill 0.61)
  Top 0.254: v82.39,73.02 77.31,78.1 77.31,89.53 73.5,93.34 73.5,95.88 IC1.19
  Bottom 0.254: v82.39,73.02 93.82,73.02 111.6,55.24 MCP4921.3 | ICSP.3 56.99,99.69 70.96,99.69 73.5,97.15 IC1.19
GND
  Top 0.61: C2.1 81.12,109.85 81.12,107.31 78.58,104.77 IC1.8 78.58,103.5 78.58,99.69 81.12,97.15 IC1.22 | USB-TTL.6 76.04,122.55 65.88,112.39 65.88,109.85 C3.1 | 45.56,108.58 43.02,111.12 S1.2 | 46.83,109.85 45.56,108.58 | 46.83,109.85 48.1,111.12 S1.1 | 45.56,108.58 PWR_LED.K | 54.45,102.23 46.83,109.85 | 21.43,112.39 21.43,107.31 C7.- | 21.43,112.39 21.43,113.66 C6.- | 15.08,128.9 17.62,128.9 IC5.GND | 15.08,128.9 4.92,128.9 4.92,122.55 DC1.3 4.92,121.28 4.92,118.74 6.19,117.47 DC1.1 | 15.08,128.9 GND.1 | 21.43,112.39 29.17,112.39 C5.1 | R52.1 3.65,79.37 3.65,88.26 EXPRESSION_CONTROL.1 | IC3.13 77.31,52.7 79.85,50.16 IC4.13 81.12,50.16 84.93,53.97 84.93,57.78 87.47,60.32 IC4.8 | JP2.1 98.9,76.83 98.9,85.72 LCD_DISPLAY.16 | LCD_DISPLAY.5 70.96,85.72 76.04,80.64 76.04,75.56 60.8,75.56 60.8,85.72 LCD_DISPLAY.1 | 54.45,102.23 51.91,99.69 51.91,88.26 53.18,86.99 53.18,83.18 51.91,81.91 CONTRAST.1 | ICSP.6 54.45,102.23 | R53.1 140.81,33.65 145.89,38.73 153.51,38.73 STYLOPHONE.1 154.78,40 156.05,41.27 156.05,103.5 139.54,103.5 ENCODER.C | 114.14,43.81 111.6,43.81 109.06,46.35 MCP4921.5 | 114.14,43.81 114.14,46.35 MCP4921.7 114.14,47.62 114.14,48.89 120.49,48.89 C8.2 | LED16.K 129.38,32.38 121.76,32.38 LED15.K | 114.14,43.81 116.68,41.27 116.68,36.19 115.41,34.92 LED14.K | LED3.K 37.94,32.38 44.29,32.38 LED4.K | 74.77,32.38 79.85,32.38 LED9.K | 74.77,32.38 73.5,32.38 LED8.K | 70.96,41.27 74.77,37.46 74.77,32.38 | 70.96,41.27 69.69,42.54 IC3.8 | 70.96,41.27 70.96,40 65.88,34.92 LED7.K
  Bottom 0.406: LED1.K 19.48,34.33 R27.1 12.53,37.38 5,37.38 4.88,37.38
  Bottom 0.61: 65.88,109.85 81.12,109.85 | 81.12,109.85 84.93,109.85 C1.2 | 81.12,109.85 C2.1 | C5.1 36.67,112.39 37.94,111.12 41.75,111.12 S1.2 | 7.46,107.31 21.43,107.31 C7.- | 7.46,107.31 4.92,107.31 3.65,108.58 IR_RX.2 | 7.46,107.31 7.46,116.2 DC1.1 | 65.88,109.85 64.61,108.58 45.56,108.58 PWR_LED.K | 65.88,109.85 C3.1 | 17.62,83.18 13.81,79.37 3.65,79.37 R52.1 | 41.75,81.91 50.64,81.91 CONTRAST.1 51.91,81.91 55.72,78.1 69.69,78.1 | 41.75,81.91 34.13,81.91 | 41.75,81.91 45.56,85.72 46.83,85.72 48.1,84.45 59.53,84.45 60.8,85.72 LCD_DISPLAY.1 | 69.69,78.1 97.63,78.1 98.9,76.83 JP2.1 | 69.69,78.1 87.47,60.32 IC4.8 | 17.62,83.18 21.43,79.37 31.59,79.37 34.13,81.91 | 17.62,83.18 R54.1 | 34.13,81.91 R6.2 | 107.79,32.38 105.25,34.92 101.44,34.92 | 115.41,34.92 117.95,32.38 121.76,32.38 | 107.79,32.38 110.33,34.92 115.41,34.92 | 107.79,32.38 LED13.K | 115.41,34.92 LED14.K | 29.05,34.92 23.97,34.92 21.43,32.38 LED1.K | 51.91,34.92 49.37,32.38 44.29,32.38 LED4.K | 29.05,34.92 31.59,32.38 36.67,32.38 LED3.K | 29.05,34.92 LED2.K | 87.47,34.92 90.01,32.38 93.82,32.38 | 59.53,32.38 62.07,34.92 65.88,34.92 LED7.K | 87.47,34.92 84.93,32.38 79.85,32.38 LED9.K | 87.47,34.92 LED10.K | 51.91,34.92 54.45,32.38 59.53,32.38 | 51.91,34.92 LED5.K | 59.53,32.38 LED6.K | 101.44,34.92 98.9,32.38 93.82,32.38 | 101.44,34.92 LED12.K | 93.82,32.38 LED11.K | 121.76,32.38 123.03,32.38 131.92,41.27 152.24,41.27 153.51,40 STYLOPHONE.1 | 121.76,32.38 LED15.K | ICSP.6 54.45,102.23 51.91,99.69 16.35,99.69 12.54,95.88 8.73,95.88 2.38,89.53 2.38,40 5,37.38
GREEN
  Top 0.254: C4.1 88.74,114.93 88.74,121.28 USB-TTL.1
LEFT
  Bottom 0.406: CL_IN.- 133,61.76 133,62.5 145.04,74.54 VOLUME.4 VOLUME.5
N$1
  Top 0.254: 125.57,53.97 125.57,51.43 123.03,48.89 C11.1 | 125.57,53.97 128.11,56.51 R4.1 | 125.57,53.97 C10.1
N$2
  Bottom 0.254: C11.2 123.03,53.97 128.11,59.05 134.46,59.05 135.73,60.32 135.73,61.59 CL_IN.+
N$3
  Bottom 0.254: R2.1 39.21,108.58 41.75,106.04 45.56,106.04 PWR_LED.A
N$4
  Bottom 0.406: R28.2 17.18,29.82 15,32 7.75,32 R27.2
  pour Top: 15.84,31.11 22.83,31.11 22.83,17.01 25.11,14.73 28.29,14.73 28.29,1.9 21.05,1.9 18.13,4.82 18.13,28.82
N$5
  Bottom 0.254: 5V_OUT.1 134.46,37.46 143.35,37.46 145.89,34.92 STYLOPHONE.2
N$6
  Top 0.254: IC1.9 76.04,104.77 76.04,111.12 XTAL.1
  Bottom 0.254: XTAL.1 76.04,112.39 78.58,114.93 81.12,114.93 C2.2
N$7
  Top 0.254: IC1.10 73.5,104.77 72.23,106.04 72.23,109.85 70.96,111.12 XTAL.2
  Bottom 0.254: XTAL.2 70.96,112.39 68.42,114.93 65.88,114.93 C3.2
N$8
  Top 0.61: D1.A 13.81,121.28 10,121.28 DC1.2
N$9
  Top 0.254: IR.K 138.27,85.72 138.27,89.53 STATUS.A
N$10
  Top 0.254: U$1.8 120.49,67.94 115.41,67.94 114.14,66.67 CL4.-
N$11
  Top 0.254: U$1.7 123.03,69.21 124.3,70.48 124.3,74.29 CL1.1
N$12
  Bottom 0.254: IC3.9 77.31,42.54 77.31,43.81 81.12,47.62 IC4.14
N$13
  Bottom 0.254: STATUS.K 138.27,92.07 133.19,92.07 R7.1
N$14
  Top 0.254: R6.1 23.97,81.91 15.08,81.91 15.08,76.83 NAV1.2
  Bottom 0.254: R47.2 4.92,62.86 15.08,73.02 15.08,75.56 NAV1.2
N$15
  Bottom 0.254: 25.24,46.35 26.51,47.62 29.05,47.62 NAV2.2 | 25.24,46.35 18.89,40 R48.2 | 25.24,46.35 3.65,46.35 3.65,51.43 4.92,52.7 R47.1
N$16
  Bottom 0.254: 5V_OUT2.1 22.7,90.8 15.08,90.8 12.54,93.34 EXPRESSION_CONTROL.2
N$17
  Bottom 0.254: LED1.A 21.43,34.92 27.78,41.27 34.13,41.27 53.18,60.32 R10.1
N$18
  Bottom 0.254: LED2.A 29.05,37.46 31.59,40 35.4,40 53.18,57.78 R11.1
N$19
  Top 0.254: NAV3.2 17.62,61.59 18.89,60.32 18.89,50.16 R48.1
  Bottom 0.254: R49.2 4.92,50.16 6.19,48.89 17.62,48.89 18.89,50.16 R48.1
N$20
  Top 0.254: LED3.A 37.94,34.92 44.29,41.27 44.29,46.35 53.18,55.24 R12.1
N$21
  Top 0.254: LED4.A 44.29,34.92 45.56,36.19 45.56,45.08 53.18,52.7 R13.1
N$22
  Top 0.254: LED5.A 51.91,37.46 51.91,48.89 53.18,50.16 R14.1
N$23
  Top 0.254: LED6.A 59.53,34.92 54.45,40 54.45,46.35 53.18,47.62 R15.1
N$24
  Bottom 0.254: R16.1 53.18,45.08 51.91,43.81 51.91,38.73 64.61,38.73 65.88,37.46 LED7.A
N$25
  Bottom 0.254: R17.1 53.18,42.54 55.72,40 68.42,40 73.5,34.92 LED8.A
N$26
  Top 0.254: LED9.A 79.85,34.92 86.2,41.27 92.55,41.27 92.55,34.92 93.82,33.65 103.98,33.65 103.98,42.54 R18.1
N$27
  Top 0.254: LED10.A 87.47,37.46 93.82,31.11 105.25,31.11 105.25,43.81 103.98,45.08 R19.1
N$28
  Top 0.254: LED11.A 93.82,34.92 98.9,34.92 100.17,36.19 102.71,36.19 102.71,46.35 103.98,47.62 R20.1
N$29
  Top 0.254: LED12.A 101.44,37.46 101.44,47.62 103.98,50.16 R21.1
N$30
  Top 0.254: LED13.A 107.79,34.92 107.79,52.7 103.98,56.51 102.71,56.51 102.71,53.97 103.98,52.7 R22.1
N$31
  Top 0.254: LED14.A 115.41,37.46 109.06,31.11 106.52,31.11 106.52,52.7 103.98,55.24 R23.1
N$32
  Bottom 0.254: R24.1 103.98,57.78 96.36,50.16 96.36,36.19 120.49,36.19 121.76,34.92 LED15.A
N$33
  Top 0.254: R25.1 110.33,60.32 110.33,57.78 112.87,55.24 112.87,52.7 115.41,50.16 121.76,50.16 121.76,42.54 129.38,34.92 LED16.A
N$34
  Bottom 0.254: R10.2 63.34,60.32 64.61,61.59 72.23,61.59 76.04,57.78 IC3.15
N$35
  Bottom 0.254: R11.2 63.34,57.78 65.88,60.32 68.42,60.32 IC3.1
N$36
  Bottom 0.254: R12.2 63.34,55.24 65.88,57.78 68.42,57.78 IC3.2
N$37
  Bottom 0.254: R13.2 63.34,52.7 65.88,55.24 68.42,55.24 IC3.3
N$38
  Bottom 0.254: R14.2 63.34,50.16 65.88,52.7 68.42,52.7 IC3.4
N$39
  Bottom 0.254: R15.2 63.34,47.62 65.88,50.16 68.42,50.16 IC3.5
N$40
  Bottom 0.254: R16.2 63.34,45.08 65.88,47.62 68.42,47.62 IC3.6
N$41
  Bottom 0.254: R17.2 63.34,42.54 65.88,45.08 68.42,45.08 IC3.7
N$42
  Bottom 0.254: IC4.15 81.12,45.08 84.93,41.27 92.55,41.27 93.82,42.54 R18.2
N$43
  Bottom 0.254: IC4.1 88.74,42.54 91.28,45.08 93.82,45.08 R19.2
N$44
  Bottom 0.254: IC4.2 88.74,45.08 91.28,47.62 93.82,47.62 R20.2
N$45
  Bottom 0.254: IC4.3 88.74,47.62 91.28,50.16 93.82,50.16 R21.2
N$46
  Bottom 0.254: IC4.4 88.74,50.16 91.28,52.7 93.82,52.7 R22.2
N$47
  Bottom 0.254: IC4.5 88.74,52.7 91.28,55.24 93.82,55.24 R23.2
N$48
  Bottom 0.254: IC4.6 88.74,55.24 91.28,57.78 93.82,57.78 R24.2
N$49
  Top 0.254: IC4.7 88.74,57.78 92.55,57.78 92.55,59.05 R25.2
N$50
  pour Top: 23.72,31.24 33.88,31.24 33.88,17.65 31.97,15.62 25.62,15.62 23.72,17.52
N$51
  pour Top: 40.61,1.9 29.05,1.9 29.05,14.73 32.48,14.73 34.77,17.01 34.77,31.11 40.61,31.11
N$52
  Bottom 0.254: LCD_DISPLAY.3 65.88,85.72 63.34,83.18 48.1,83.18 46.83,84.45 CONTRAST.2
N$53
  pour Top: 41.37,31.11 47.34,31.11 47.34,16.89 49.75,14.73 53.05,14.73 53.05,1.9 41.37,1.9
N$54  (via drill 0.8)
  Top 0.305: R26.2 101.9,83.9 v101,83
  Bottom 0.305: v101,83 97.5,83 96.5,84 96.5,85.84 LCD_DISPLAY.15
N$55
  Top 0.254: R32.2 50.64,29.84 50.64,28.06
  pour Top: 48.23,28.7 49.12,28.06 53.56,28.06 58.77,26.16 58.77,17.39 56.86,15.74 50.01,15.74 48.23,17.39
N$56
  Bottom 0.406: TP1.1 60.08,8.45 R32.1 60.08,27.26 R33.2
  pour Top: 53.81,14.73 57.24,14.73 59.28,16.63 61.44,14.73 64.48,14.73 64.48,1.9 53.81,1.9
N$57
  pour Top: 59.91,25.78 60.93,25.39 61.82,26.16 61.82,30.98 70.2,30.98 70.2,17.39 68.42,15.74 61.82,15.74 59.91,17.27
N$58
  pour Top: 71.09,30.98 76.67,30.86 76.67,1.77 65.37,1.9 65.37,14.73 68.93,14.73 71.09,16.89
N$59
  pour Top: 77.69,30.98 83.41,30.98 83.41,17.01 85.69,14.85 89.12,14.85 89.12,1.9 77.69,1.9
N$60
  Top 0.254: R37.2 84.93,29.84 84.93,28.57 85.18,28.19
  pour Top: 84.3,28.57 85.18,28.19 88.36,28.19 94.71,25.52 94.71,17.39 92.93,15.74 86.2,15.74 84.3,17.39
N$61
  Bottom 0.406: TP2.1 95.12,7.37 R37.1 95.12,26.97 R38.2
  pour Top: 95.34,16.76 97.25,14.85 100.42,14.85 100.42,1.9 90.01,1.9 90.01,14.85 93.31,14.85
N$62
  Top 0.254: R39.2 100.17,29.84 100.17,28.06
  pour Top: 95.85,25.14 97.5,26.66 97.5,28.57 98.9,28.06 102.08,28.06 106.39,26.28 106.39,17.52 104.61,15.74 97.63,15.74 95.85,17.39
N$63
  Bottom 0.406: TP3.1 109.21,10.05 R39.1 109.09,26.87 R40.2
  pour Top: 106.9,16.76 108.81,14.85 111.98,14.85 111.98,1.9 101.44,1.9 101.44,14.85 105,14.85
N$64
  pour Top: 107.41,26.03 109.57,25.14 111.09,26.66 111.09,30.98 117.95,30.98 117.95,17.65 115.92,15.74 109.19,15.74 107.41,17.52
N$65
  pour Top: 118.84,30.98 124.43,30.98 124.43,1.9 113,1.9 113,14.85 116.43,14.85 118.84,17.14
N$66
  pour Top: 125.44,30.98 130.9,30.98 130.9,17.01 133.06,14.85 136.49,14.85 136.49,1.9 125.44,1.9
N$67
  Top 0.254: R44.2 134.46,29.84 134.46,28.19
  pour Top: 131.79,28.7 132.68,28.19 136.75,28.19 142.33,26.03 142.33,17.65 140.43,15.87 133.32,15.87 131.79,17.39
N$68
  Top 0.254: R44.1 143.35,27.3 140.81,29.84 R45.2
  Bottom 0.254: R44.1 143.35,27.3 143.35,4.44 139.54,4.44 TP4.1
  pour Top: 142.72,16.89 144.75,14.85 147.92,14.85 147.92,1.9 137.38,1.9 137.38,14.85 140.68,14.85
N$69
  pour Top: 143.22,25.78 144.62,25.14 145.38,26.41 145.38,30.98 153.76,30.98 153.76,17.27 152.11,15.74 145.25,15.74 143.22,17.52
N$70
  Top 0.254: R50.2 49.37,67.94 43.02,61.59 NAV4.2
  Bottom 0.254: R49.1 15.08,50.16 23.97,59.05 39.21,59.05 41.75,61.59 NAV4.2
N$71
  Top 0.254: 35.4,67.94 39.21,67.94 R50.1 | 35.4,67.94 29.05,61.59 NAV5.2 | 35.4,67.94 R51.2
N$72
  Top 0.254: 10,69.21 10,70.48 NAV1.4 | 10,69.21 10,57.78 11.27,56.51 NAV3.4 12.54,56.51 12.54,43.81 22.7,43.81 | 22.7,43.81 23.97,43.81 NAV2.4 | 22.7,43.81 22.7,55.24 23.97,56.51 NAV5.4 | 10,69.21 23.97,69.21 NAV6.4
  Bottom 0.254: R52.2 3.65,69.21 4.92,70.48 10,70.48 NAV1.4 | NAV4.4 36.67,56.51 35.4,57.78 25.24,57.78 23.97,56.51 NAV5.4
N$73
  Top 0.254: RX_ON/OFF.1 10,98.42 4.92,103.5 4.92,109.85 3.65,111.12 IR_RX.3
N$74
  Top 0.254: 131.92,67.94 133.19,67.94 CL5.+ | 131.92,67.94 128.11,67.94 U$1.5 | 131.92,67.94 131.92,74.29 CL2.1
  Bottom 0.254: CL3.1 103.98,74.29 107.79,78.1 123.03,78.1 133.19,67.94 CL5.+
N$75
  Bottom 0.254: R9.2 105.25,106.04 93.82,117.47 87.47,117.47 83.66,121.28 USB-TTL.3
N$76
  Bottom 0.254: R8.2 107.79,106.04 95.09,118.74 88.74,118.74 86.2,121.28 USB-TTL.2
N$77
  Top 0.254: RL2.2 111.6,74.29 109.06,74.29 CL3.2
N$78
  Top 0.254: CL2.2 137,74.29 138.27,75.56 138.27,78.1 RL1.1
N$79
  Top 0.254: 144.62,93.34 145.89,93.34 DIST.1 | 144.62,93.34 138.27,93.34 120.49,75.56 120.49,73.02 121.76,71.75 121.76,62.86 120.49,61.59 U$1.1 | 144.62,93.34 144.62,86.99 145.89,85.72 BASS.1
N$80
  Top 0.254: DIST.2 147.16,90.8 149.7,93.34 149.7,98.42 148.43,99.69 135.73,99.69 135.73,92.07 114.14,70.48 114.14,69.21 CL4.+
N$81
  Top 0.254: RL2.1 121.76,74.29 128.11,80.64 144.62,80.64 144.62,81.91 145.89,83.18 BASS.2
N$82  (via drill 0.8)
  Top 0.406: v137.5,64 126.5,64 125.5,63 125.5,61.34 | 125.5,61.34 125.5,61 | U$1.3 125.5,61.34
  Bottom 0.406: VOLUME.3 145.5,72 v137.5,64
N$83
  Top 0.254: SPEAKER.1 142.08,74.29 144.62,71.75 144.62,64.13 147.16,61.59 147.16,56.51 AUDIO_OUT.3
N$84
  Top 0.254: CL5.- 135.73,67.94 139.54,64.13 139.54,62.86 AUDIO.1 140.81,61.59 140.81,59.05 145.89,53.97 AUDIO_OUT.2 147.16,52.7 149.7,55.24 149.7,61.59 150.97,62.86 AUDIO_OUT.5
N$85  (via drill 1.02)
  other vias: 129.67,105.78
N$86  (via drill 1.02)
  other vias: 125.67,102.78
N$87  (via drill 1.02)
  other vias: 125.67,105.32
N$88  (via drill 1.02)
  other vias: 125.67,107.86
N$89  (via drill 1.02)
  other vias: 123.13,110.4
N$90  (via drill 1.02)
  other vias: 123.13,102.78
N$91  (via drill 1.02)
  other vias: 123.13,105.32
N$92  (via drill 1.02)
  other vias: 123.13,107.86
N$93  (via drill 1.02)
  other vias: 120.59,110.4
N$94  (via drill 1.02)
  other vias: 129.67,108.32
N$96  (via drill 1.02)
  other vias: 120.59,107.86
N$97  (via drill 1.02)
  other vias: 118.05,110.4
N$98  (via drill 1.02)
  other vias: 118.05,102.78
N$99  (via drill 1.02)
  other vias: 118.05,105.32
N$100  (via drill 1.02)
  other vias: 118.05,107.86
N$101  (via drill 1.02)
  other vias: 115.51,110.4
N$102  (via drill 1.02)
  other vias: 129.67,103.3
N$103  (via drill 1.02)
  other vias: 115.51,105.32
N$104  (via drill 1.02)
  other vias: 115.51,107.86
N$105  (via drill 1.02)
  other vias: 129.67,95.68
N$106  (via drill 1.02)
  other vias: 112.97,102.78
N$107  (via drill 1.02)
  other vias: 112.97,105.32
N$108  (via drill 1.02)
  other vias: 112.97,107.86
N$109  (via drill 1.02)
  other vias: 125.67,100.3
N$110  (via drill 1.02)
  other vias: 125.67,92.68
N$111  (via drill 1.02)
  other vias: 125.67,95.22
N$112  (via drill 1.02)
  other vias: 125.67,97.76
N$113  (via drill 1.02)
  other vias: 123.13,100.3
N$114  (via drill 1.02)
  other vias: 123.13,92.68
N$115  (via drill 1.02)
  other vias: 123.13,95.22
N$116  (via drill 1.02)
  other vias: 123.13,97.76
N$117  (via drill 1.02)
  other vias: 120.59,100.3
N$118  (via drill 1.02)
  other vias: 129.67,98.22
N$119  (via drill 1.02)
  other vias: 120.59,95.22
N$120  (via drill 1.02)
  other vias: 120.59,97.76
N$121  (via drill 1.02)
  other vias: 118.05,100.3
N$122  (via drill 1.02)
  other vias: 118.05,92.68
N$123  (via drill 1.02)
  other vias: 118.05,95.22
N$124  (via drill 1.02)
  other vias: 118.05,97.76
N$125  (via drill 1.02)
  other vias: 115.51,100.3
N$126  (via drill 1.02)
  other vias: 129.67,100.76
N$127  (via drill 1.02)
  other vias: 115.51,95.22
N$128  (via drill 1.02)
  other vias: 115.51,97.76
N$129  (via drill 1.02)
  other vias: 112.97,100.3
N$130  (via drill 1.02)
  other vias: 112.97,92.68
N$131  (via drill 1.02)
  other vias: 112.97,95.22
N$132  (via drill 1.02)
  other vias: 112.97,97.76
N$133  (via drill 1.02)
  other vias: 133.67,106.78
N$136  (via drill 1.02)
  other vias: 133.67,104.3
N$137  (via drill 1.02)
  other vias: 133.67,96.68
N$138  (via drill 1.02)
  other vias: 133.67,99.22
N$139  (via drill 1.02)
  other vias: 133.67,101.76
RESET  (via drill 0.61)
  Top 0.254: R5.1 36.67,108.58 39.21,111.12 39.21,113.66 41.75,116.2 S1.4 43.02,116.2 48.1,116.2 S1.3 | v91.28,109.85 96.36,104.77 IC1.1 | v56.99,111.12 56.99,102.23 ICSP.5
  Bottom 0.254: 56.99,116.2 49.37,116.2 S1.3 | 56.99,116.2 82.39,116.2 82.39,114.93 87.47,109.85 C4.2 88.74,109.85 v91.28,109.85 | 56.99,116.2 v56.99,111.12
RX
  Bottom 0.254: R8.1 107.79,95.88 106.52,97.15 100.17,97.15 93.82,103.5 IC1.2 93.82,104.77 92.55,106.04 55.72,106.04 50.64,100.96 11.27,100.96 RX_ON/OFF.2
TX  (via drill 0.61)
  Top 0.254: 105.25,95.88 105.25,99.69 95.09,99.69 91.28,103.5 IC1.3 | v125.57,83.18 105.25,83.18 105.25,95.88 | 105.25,95.88 R9.1
  Bottom 0.254: v125.57,83.18 131.92,83.18 133.19,81.91 R7.2
VCC  (via drill 0.8)
  Top 0.305: 5V_OUT.2 132.38,41.88 v140.74,50.23
  Top 0.61: 120.49,53.97 116.68,53.97 MCP4921.1 | 120.49,53.97 120.49,57.78 129.38,57.78 130.65,56.51 R1.2 | 120.49,53.97 C8.1 | IC3.10 77.31,45.08 79.85,42.54 IC4.16 | IC1.20 76.04,97.15 73.5,99.69 60.8,99.69 60.8,89.53 63.34,86.99 LCD_DISPLAY.2 | 39.21,98.42 36.67,98.42 | 46.83,90.8 39.21,98.42 | 46.83,90.8 50.64,86.99 CONTRAST.3 | 39.21,98.42 R2.2 | 46.83,90.8 46.83,89.53 35.4,78.1 R51.1 32.79,77.72 NAV6.2 27,71.93 27,42 26,41 23.5,41 19,36.5 4,36.5 3,35.5 v3,33.5 | 82.39,112.39 82.39,106.04 81.12,104.77 IC1.7 | 82.39,112.39 84.93,114.93 C1.1 | 82.39,112.39 82.39,121.28 81.12,122.55 USB-TTL.4 | IC5.OUT 18.89,125.09 20.16,123.82 20.16,106.04 21.43,104.77 C7.+ 21.43,103.5 21.43,98.42 | 36.67,98.42 21.43,98.42 | 36.67,98.42 R5.2 | 21.43,98.42 21.43,97.07 25,93.5 25,89.87 5V_OUT2.2
  Bottom 0.254: 5V_OUT.2 131.92,37.46
  Bottom 0.406: R26.1 90.76,116.6 85.95,116.6 84.74,115.39 C1.1
  Bottom 0.61: 78.58,59.05 79.85,57.78 IC4.10 81.12,57.78 84.93,57.78 84.93,51.43 82.39,48.89 79.85,48.89 77.31,46.35 77.31,45.08 IC3.10 | 78.58,59.05 77.31,60.32 IC3.16 76.06,60.94 64.5,72.5 40.65,72.5 R51.1 | 78.58,59.05 105.25,59.05 105.25,53.97 107.79,51.43 114.14,51.43 116.68,53.97 MCP4921.1 | R46.1 157.32,27.3 157.32,31.11 156.05,32.38 156.05,47.62 143.35,47.62 v140.74,50.23 139.74,51.23 139.54,51.43 135.73,51.43 130.65,56.51 R1.2 | ICSP.2 54.45,97.15 53.18,98.42 39.21,98.42 R2.2 | LCD_DISPLAY.2 63.34,86.99 62.07,88.26 53.18,88.26 51.91,86.99 CONTRAST.3 | 5V.1 15.08,125.09 16.35,126.36 17.62,126.36 IC5.OUT 18.89,125.09 23.97,120.01 78.58,120.01 81.12,122.55 USB-TTL.4 | IR_RX.1 3.65,106.04 4.92,104.77 21.43,104.77 C7.+ | BODYSWITCH_5V.1 3.01,33.48 v3,33.5
  pour Top: 154.65,30.98 158.59,30.98 158.59,25.39 158.08,24.51 158.08,1.9 148.94,1.9 148.94,14.85 152.37,14.85 154.65,17.01
  pour Top: 4.92,31.11 14.06,31.11 15.33,29.84 5.68,20.19 0.86,24.51 6.19,29.84
VIN
  Top 0.406: IC5.IN 16.75,130.91 VIN.1
  Top 0.61: IC5.IN 20.16,131.44 21.43,130.17 21.43,130.07 29,122.5 29,117.49 C5.2 29.17,117.47 21.43,117.47 C6.+
  Bottom 0.61: D1.C 15.08,111.12 21.43,117.47 C6.+
VOUT
  Bottom 0.254: R4.2 128.11,46.35 116.68,46.35 MCP4921.8
VREF
  Top 0.254: 133.19,46.35 130.65,46.35 R1.1 | 133.19,46.35 133.19,48.89 137,48.89 C9.1 | 133.19,46.35 R3.2
  Bottom 0.254: MCP4921.6 111.6,47.62 115.41,51.43 125.57,51.43 130.65,46.35 R1.1

## Text on the board
tNames: CHEAP, FAT and OPEN | MFRU 2010 EDITION
tValues: GND | TX | +5V | RX | reset | power | RX ON